# Altium PCB signalIsolator.PcbDoc
Units mil, origin at the board's own origin, x right, y up, seen from the top; angles counter-clockwise.
Board outline 1205 x 1320 mil, 2 copper layers (Top Layer, Bottom Layer); 9 components, 11 nets, 33 pads, 0 vias.
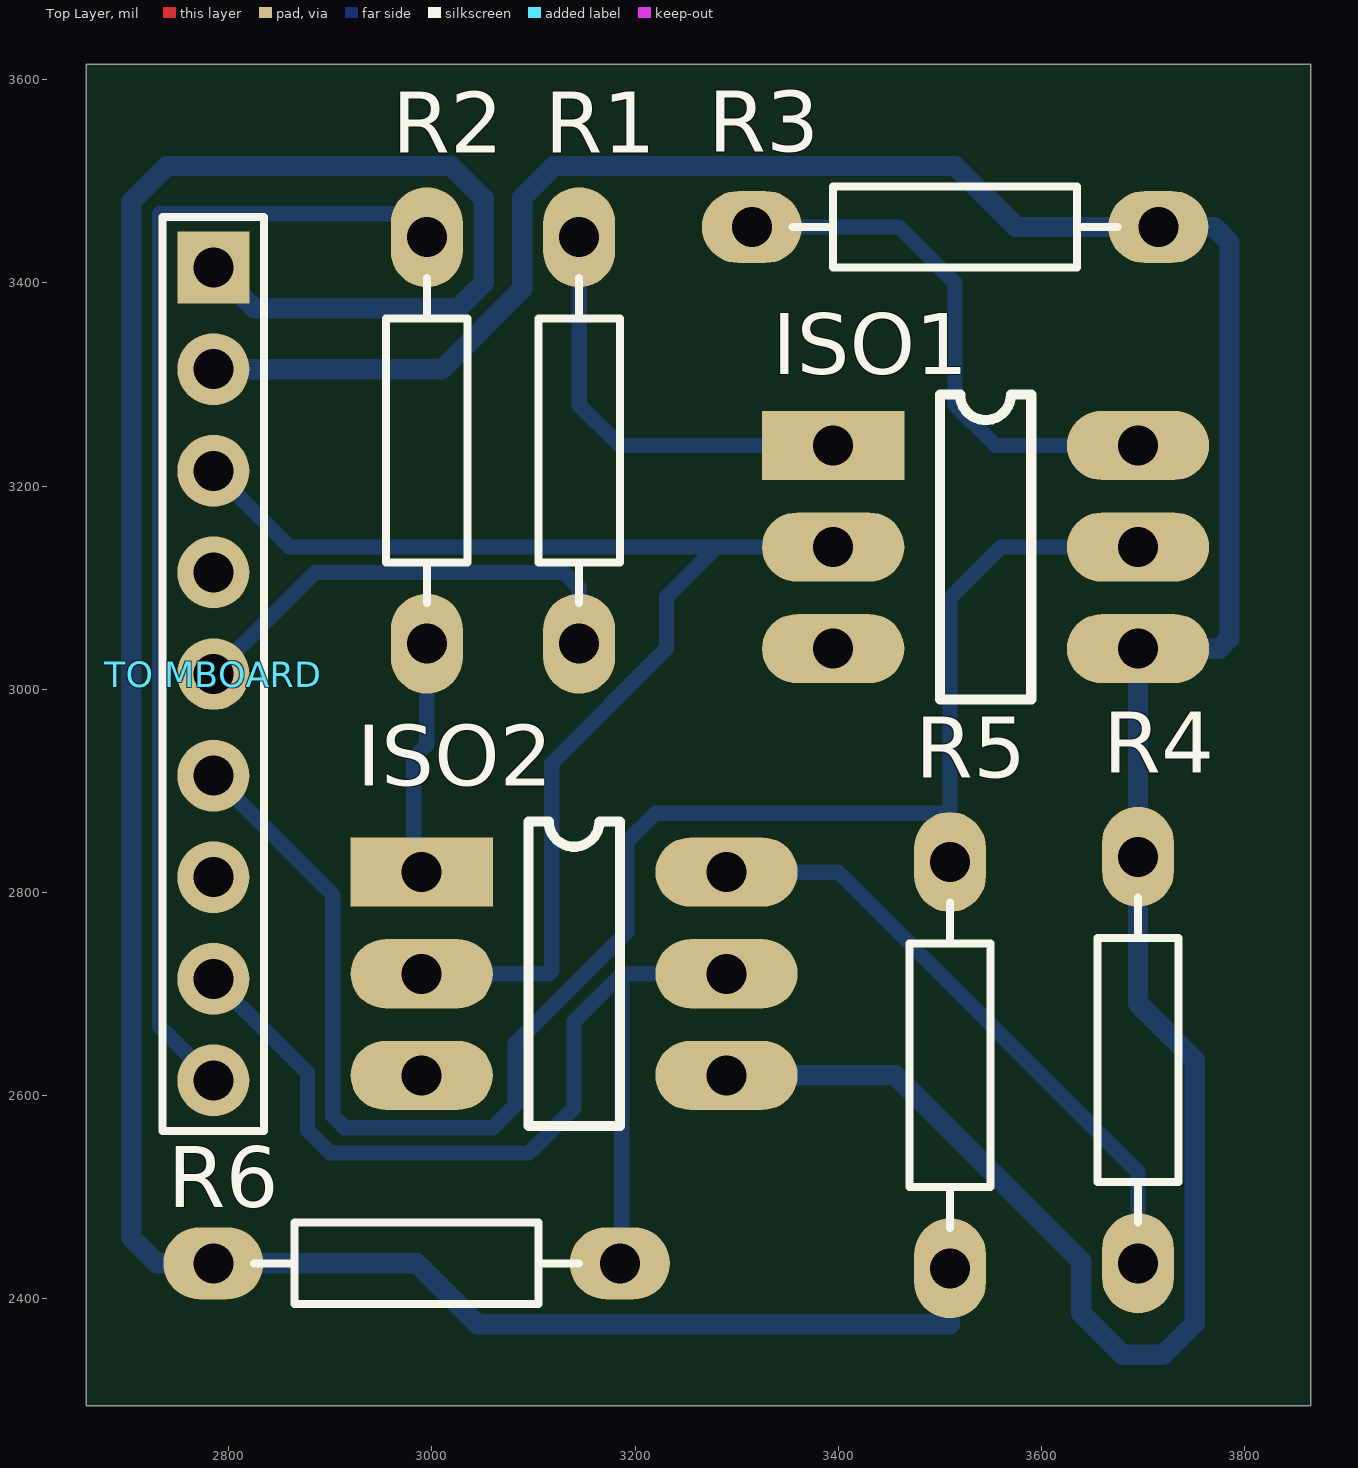
[diagram p0: Top Layer view]
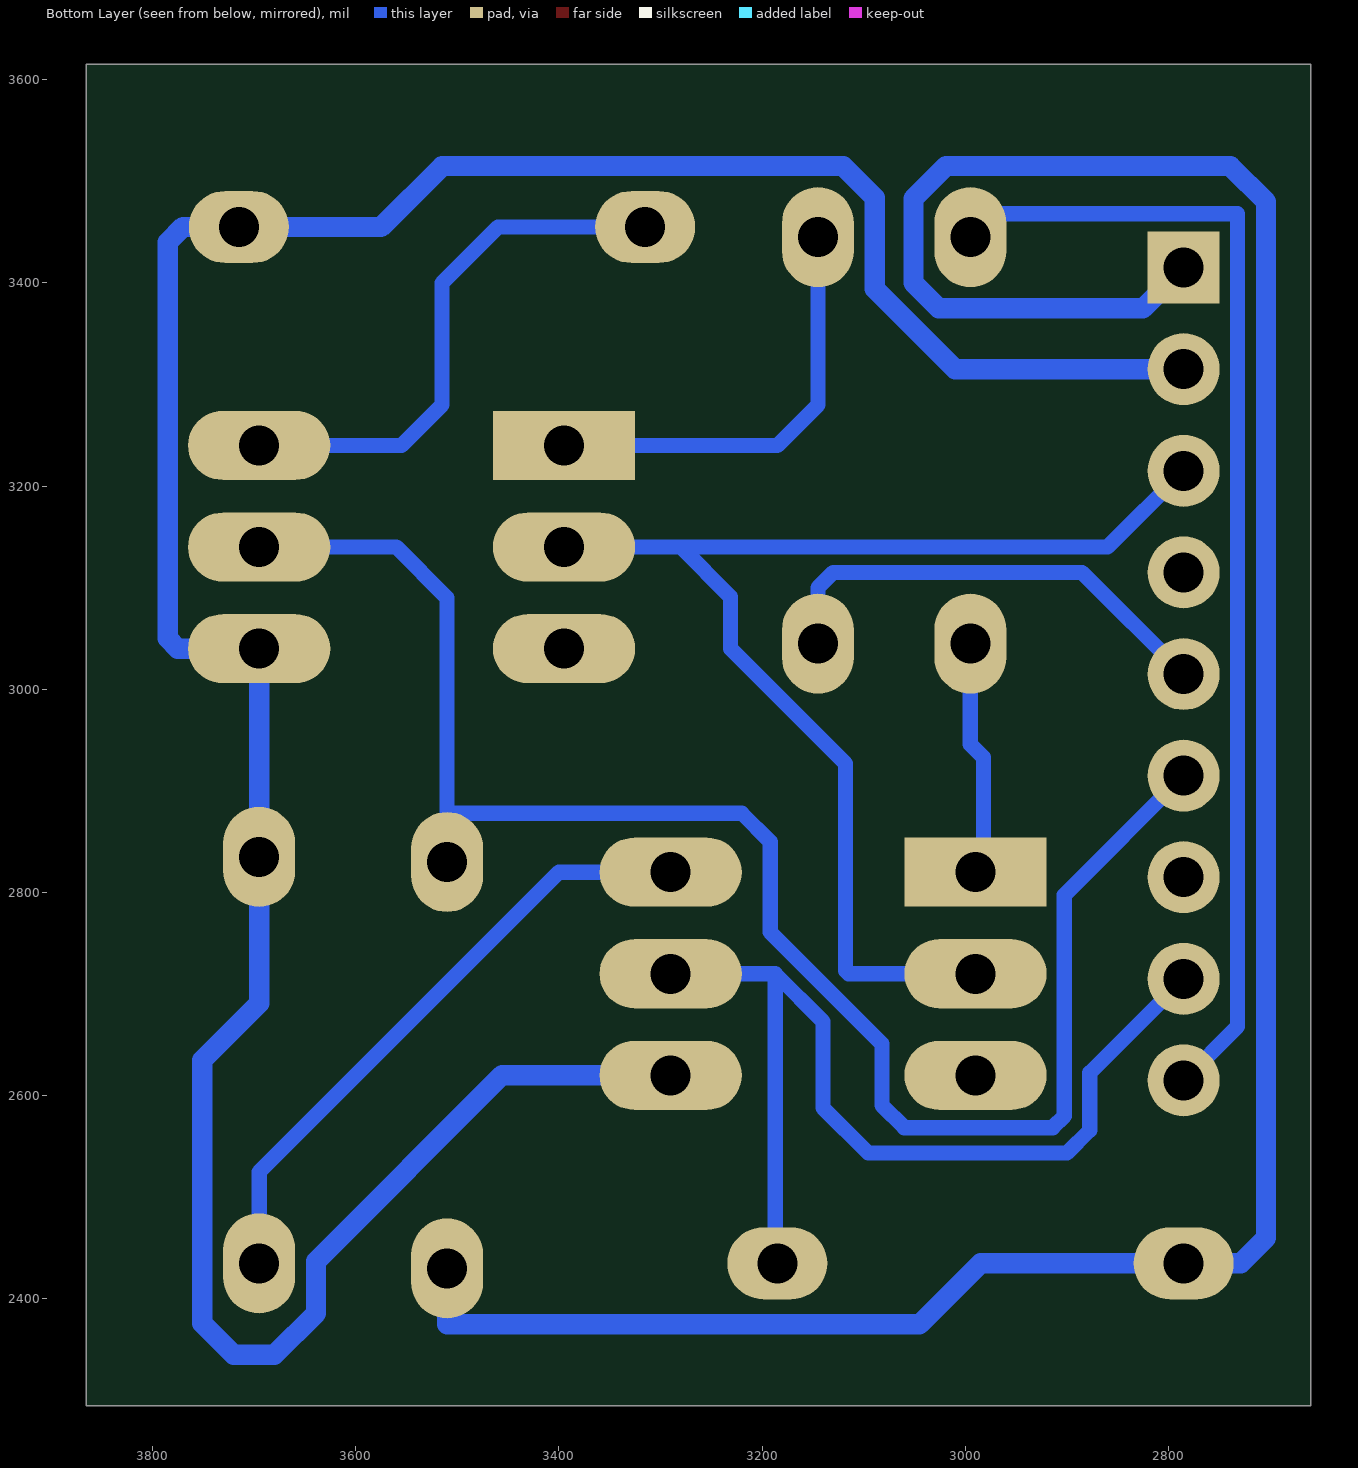
[diagram p1: Bottom Layer view, seen from below]

## Layer stack, top to bottom
Top Solder: solder mask 0.4, Solder Resist, Dk 3.5
Top Layer: signal copper 1.4
Dielectric 1: dielectric 12.6, FR-4, Dk 4.8
Bottom Layer: signal copper 1.4
Bottom Solder: solder mask 0.4, Solder Resist, Dk 3.5

## Board outline
2660,2295 3865,2295 3865,3615 2660,3615

## Design rules (kind name [scope] priority, off if disabled: settings)
Clearance [All] p1: gap=10
PolygonConnect [All] p1: connectstyle=Relief reliefconductorwidth=10 reliefentries=4 polygonreliefangle="90 Angle" airgapwidth=10
RoutingLayers [All] p1: top layer_v5=FALSE bottom layer_v5=TRUE
RoutingVias [All] p1: holewidth=28 width=50 viastyle="Through Hole" minholewidth=28 minwidth=50 maxholewidth=28 maxwidth=50
SolderMaskExpansion [All] p1: expansion=4
UnpouredPolygon [All] p1: allowunpoured=FALSE
Width Width_pow [(InNet('VPOWER') OR InNet('PGND'))] p1: maxlimit=25 minlimit=15 preferedwidth=20 minimp=50.000000 maximp=50.000000 favimp=50.000000
Width [All] p2: maxlimit=15 minlimit=10 preferedwidth=15 minimp=50.000000 maximp=50.000000 favimp=50.000000
28 further rules are at their usual default settings.

## Components (designator, comment, footprint, x,y, rotation, side; value= is the part's Value field where it differs from the comment)
ISO1 "4N35" DIP6LGE 3395,3240 r0 top
ISO2 "4N35" DIP6LGE 2990,2820 r0 top
R1 "-Res" Res10mm_LGE1.0 3145,3245 r270 top
R2 "" Res10mm_LGE1.0 2995,3245 r90 top
R3 "G-Res" Res10mm_LGE1.0 3515,3455 r180 top
R4 "G-Res" Res10mm_LGE1.0 3695,2635 r270 top
R5 "G-Res" Res10mm_LGE1.0 3510,2630 r270 top
R6 "G-Res" Res10mm_LGE1.0 2985,2435 r180 top
"TO MBOARD" "" HDR1X9_LGE1.0 2785,3415 r270 top

## Footprints (in the part's own frame and the unit in brackets; to place one, negate y for a bottom-side part, rotate by r counter-clockwise, add the part's x,y. Pads: shape width x height; smd on the part's side, far side on the other; paste and mask are expansions set on the pad)
DIP6LGE [mil]
  rect 140x68 hole 39.37: 1(0,0)
  oval 140x68 hole 39.37: 2(0,-100) 3(0,-200) 4(300,-200) 5(300,-100) 6(300,0)
  silkscreen extent 105,-250 195,50
HDR1X9_LGE1.0 [mm] "Connector; Header; 10 Position"
  rect 1.8x1.8 hole 1: 1(0,0)
  round 1.8 hole 1: 2(2.54,0) 3(5.08,0) 4(7.62,0) 5(10.16,0) 6(12.7,0) 7(15.24,0) 8(17.78,0) 9(20.32,0)
  silkscreen extent -1.27,-1.27 21.59,1.27
Res10mm_LGE1.0 [mm] "Axial Device, Thru-Hole; 2 Leads; 0.4 in Pin Spacing"
  oval 2.5x1.8 hole 1: 1(-5.08,0) 2(5.08,0)
  silkscreen extent -4.06,-1.02 4.06,1.02

## Part data
R1 R2: library part G-Res, "resistor (specify value)"
R3 R4 R5 R6: "resistor (specify value)"
"TO MBOARD": library part C-Hdr1x9, "Header, 10-Pin"

## Nets (pads, with @x,y where several pads share a name; then routed paths per layer and width w, separated by ;. In a path a pad name is that pad's centre, name@x,y a point inside that pad or via, vN(x,y) a via of type N, cw(c..) or ccw(c..) an arc to the next point about the centre after c; other vN are vias at no path point)
DGND: "TO MBOARD.3" ISO1.2 ISO2.2 | length 1254.4
  Bottom Layer w15: 2785,3215 2860,3140 3280,3140 ; ISO2.2 3115,2720 3118,2723 3118,2927 3231,3040 3231,3091 3280,3140 ; ISO1.2 3280,3140
NetISO1_1: ISO1.1 R1.1 | length 431.6
  Bottom Layer w15: R1.1 3145,3280 3185,3240 ISO1.1
NetISO1_6: ISO1.6 R3.2 | length 539.4
  Bottom Layer w15: R3.2 3460,3455 3515,3400 3515,3280 3555,3240 ISO1.6
NetISO2_1: ISO2.1 R2.1 | length 238.2
  Bottom Layer w15: ISO2.1 2982.16,2820 2982.16,2933 2995,2945.84 R2.1
NetISO2_6: ISO2.6 R4.2 | length 617.2
  Bottom Layer w15: ISO2.6 3400,2820 3695,2525 R4.2
O\U\T\: "TO MBOARD.8" ISO2.5 R6.1 | length 1019
  Bottom Layer w15: 2785,2715 2877.5,2622.5 2877.5,2566 2900,2543.5 3095.5,2543.5 3140,2588 3140,2673 3187,2720 ; R6.1 3187,2435 3187,2720 ; ISO2.5 3187,2720
OUT: "TO MBOARD.6" ISO1.5 R5.1 | length 1677.4
  Bottom Layer w15: 2785,2915 2902.5,2797.5 2902.5,2580 2914,2568.5 3060,2568.5 3082,2590.5 3082,2651 3192,2761 3192,2850 3220,2878 R5.1@3510,2878 ; R5.1 R5.1@3510,2878 ; ISO1.5 3560,3140 3510,3090 R5.1@3510,2878
PGND: "TO MBOARD.2" ISO1.4 ISO2.4 R3.1 R4.1 | length 2955.6
  Bottom Layer w20: 2785,3315 3010,3315 3089,3394 3089,3484 3120,3515 3515,3515 3575,3455 R3.1 3770,3455 3785,3440 3785,3050 3775,3040 ISO1.4 R4.1 3695,2691 3751,2635 3751,2376 3720,2345 3680,2345 3639,2386 3639,2437 3456,2620 ISO2.4
S\I\G\: "TO MBOARD.9" R2.2 | length 1161
  Bottom Layer w15: 2785,2615 2732,2668 2732,3468 2995,3468 R2.2
SIG: "TO MBOARD.5" R1.2 | length 462.6
  Bottom Layer w15: 2785,3015 2885,3115 3130,3115 3145,3100 R1.2
VPOWER: "TO MBOARD.1" R5.2 R6.2 | length 2666.9
  Bottom Layer w20: 2785,3415 2825,3375 3026,3375 3051,3400 3051,3483 3019,3515 2739,3515 2704,3480 2704,2460 2729,2435 R6.2 2985,2435 3045,2375 3510,2375 R5.2
pads on no net: "TO MBOARD.4" "TO MBOARD.7" ISO1.3 ISO2.3

## Silkscreen, mask and mechanical layers (free items; w line width, h text height)
Mechanical 1:
  the board outline again, w10